# EAGLE board CT_schematic (EAGLE 7.6.0)

Size 100 x 80 mm. Coordinates in mm from the lower left corner, seen from the top.
Outline: 0,0 100,0 100,80 0,80 0,0
Copper layers (1*16): Top 0.035mm / dielectric 1.5mm / Bottom 0.035mm
Design rules "default": minimum track width 10mil, minimum drill 24mil, track to track 8mil, track to pad 8mil, pad to pad 8mil, via to via 8mil, smd to smd 8mil, copper to edge 40mil, drill to drill 8mil, minimum pad ring 10mil, minimum via ring 8mil, stop-mask expansion 4mil, vias tented up to drill 0mil, thermal gap 10mil

## Footprints (pad centres in the part's own frame; a part is rotated, then mirrored left to right if it is on the bottom)
C0603 = smd 0.8 x 0.8: 1 -0.762,0; 2 0.762,0
C0402 = smd 0.5 x 0.5: 1 -0.508,0; 2 0.508,0
R0603 = smd 0.8 x 0.8: 1 -0.762,0; 2 0.762,0
C0805 = smd 1.2 x 1.3: 1 -1.016,0; 2 1.016,0
C1210 = smd 1.2 x 2.5: 1 -1.524,0; 2 1.524,0
EXV-9H = smd 3.505 x 1.676: 1 -2.857,0; 2 2.857,0
L0603 = smd 0.8 x 0.8: 1 -0.762,0; 2 0.762,0
PJ-037B_PACKAGE = drill 3.7 square: 1 12,0 | drill 3.2 square: 2 6,0
WLCSP180 = smd 0.225 x 0.225: A1 -2.4,2.6; A2 -2,2.6; A3 -1.6,2.6; A4 -1.2,2.6; A5 -0.8,2.6; A6 -0.4,2.6; A7 0,2.6; A8 0.4,2.6; A9 0.8,2.6; A10 1.2,2.6; A11 1.6,2.6; A12 2,2.6; A13 2.4,2.6; B1 -2.4,2.2; B2 -2,2.2; B3 -1.6,2.2; B4 -1.2,2.2; B5 -0.8,2.2; B6 -0.4,2.2; B7 0,2.2; B8 0.4,2.2; B9 0.8,2.2; B10 1.2,2.2; B11 1.6,2.2; B12 2,2.2; B13 2.4,2.2; C1 -2.4,1.8; C2 -2,1.8; C3 -1.6,1.8; C4 -1.2,1.8; C5 -0.8,1.8; C6 -0.4,1.8; C7 0,1.8; C8 0.4,1.8; C9 0.8,1.8; C10 1.2,1.8; C11 1.6,1.8; C12 2,1.8; C13 2.4,1.8; D1 -2.4,1.4; D2 -2,1.4; D3 -1.6,1.4; D4 -1.2,1.4; D5 -0.8,1.4; D6 -0.4,1.4; D7 0,1.4; D8 0.4,1.4; D9 0.8,1.4; D10 1.2,1.4; D11 1.6,1.4; D12 2,1.4; D13 2.4,1.4; E1 -2.4,1; E2 -2,1; E3 -1.6,1; E4 -1.2,1; E5 -0.8,1; E6 -0.4,1; E7 0,1; E8 0.4,1; E9 0.8,1; E10 1.2,1; E11 1.6,1; E12 2,1; E13 2.4,1; F1 -2.4,0.6; F2 -2,0.6; F3 -1.6,0.6; F4 -1.2,0.6; F5 -0.8,0.6; F6 -0.4,0.6; F7 0,0.6; F8 0.4,0.6; F9 0.8,0.6; F10 1.2,0.6; F11 1.6,0.6; F12 2,0.6; F13 2.4,0.6; G1 -2.4,0.2; G2 -2,0.2; G3 -1.6,0.2; G4 -1.2,0.2; G5 -0.8,0.2; G6 -0.4,0.2; G8 0.4,0.2; G9 0.8,0.2; G10 1.2,0.2; G11 1.6,0.2; G12 2,0.2; G13 2.4,0.2; H1 -2.4,-0.2; H2 -2,-0.2; H3 -1.6,-0.2; H4 -1.2,-0.2; H5 -0.8,-0.2; H6 -0.4,-0.2; H8 0.4,-0.2; H9 0.8,-0.2; H10 1.2,-0.2; H11 1.6,-0.2; H12 2,-0.2; H13 2.4,-0.2; J1 -2.4,-0.6; J2 -2,-0.6; J3 -1.6,-0.6; J4 -1.2,-0.6; J5 -0.8,-0.6; J6 -0.4,-0.6; J7 0,-0.6; J8 0.4,-0.6; J9 0.8,-0.6; J10 1.2,-0.6; J11 1.6,-0.6; J12 2,-0.6; J13 2.4,-0.6; K1 -2.4,-1; K2 -2,-1; K3 -1.6,-1; K4 -1.2,-1; K5 -0.8,-1; K6 -0.4,-1; K7 0,-1; K8 0.4,-1; K9 0.8,-1; K10 1.2,-1; K11 1.6,-1; K12 2,-1; K13 2.4,-1; L1 -2.4,-1.4; L2 -2,-1.4; L3 -1.6,-1.4; L4 -1.2,-1.4; L5 -0.8,-1.4; L6 -0.4,-1.4; L7 0,-1.4; L8 0.4,-1.4; L9 0.8,-1.4; L10 1.2,-1.4; L11 1.6,-1.4; L12 2,-1.4; L13 2.4,-1.4; M1 -2.4,-1.8; M2 -2,-1.8; M3 -1.6,-1.8; M4 -1.2,-1.8; M5 -0.8,-1.8; M6 -0.4,-1.8; M7 0,-1.8; M8 0.4,-1.8; M9 0.8,-1.8; M10 1.2,-1.8; M11 1.6,-1.8; M12 2,-1.8; M13 2.4,-1.8; N1 -2.4,-2.2; N2 -2,-2.2; N3 -1.6,-2.2; N4 -1.2,-2.2; N5 -0.8,-2.2; N6 -0.4,-2.2; N7 0,-2.2; N8 0.4,-2.2; N9 0.8,-2.2; N10 1.2,-2.2; N11 1.6,-2.2; N12 2,-2.2; N13 2.4,-2.2; P1 -2.4,-2.6; P2 -2,-2.6; P3 -1.6,-2.6; P4 -1.2,-2.6; P5 -0.8,-2.6; P6 -0.4,-2.6; P7 0,-2.6; P8 0.4,-2.6; P9 0.8,-2.6; P10 1.2,-2.6; P11 1.6,-2.6; P12 2,-2.6; P13 2.4,-2.6
SOIC-8 = smd 1.6 x 0.6: 1 -2.7,1.905 | smd 1.55 x 0.6: 2 -2.7,0.635; 3 -2.7,-0.635; 4 -2.7,-1.905; 5 2.7,-1.905; 6 2.7,-0.635; 7 2.7,0.635; 8 2.7,1.905
182-009-MALE = drill 1.194 pad 1.524 octagon: 1 -5.537,10.923; 2 -2.769,10.923; 3 0,10.923; 4 2.769,10.923; 5 5.537,10.923; 6 -4.153,8.08; 7 -1.384,8.08; 8 1.384,8.08; 9 4.153,8.08 | hole 3.048: -12.446,9.501; 12.446,9.501
S25FL128SDSMFI000 = smd 0.5 x 1.6: 1 0,0; 2 1.27,0; 3 2.54,0; 4 3.81,0; 5 5.08,0; 6 6.35,0; 7 7.62,0; 8 8.89,0; 9 8.89,8.9; 10 7.62,8.9; 11 6.35,8.9; 12 5.08,8.9; 13 3.81,8.9; 14 2.54,8.9; 15 1.27,8.9; 16 0,8.9
DFN-6 = smd 0.805 x 0.3: 1 -0.952,0.5; 2 -0.952,0; 3 -0.952,-0.5; 4 0.952,-0.5; 5 0.952,0; 6 0.952,0.5 | smd 0.61 x 1.42: 7 0,0
QFN-24 = smd 0.7 x 0.305: 1 -1.815,1.25; 2 -1.815,0.75; 3 -1.815,0.25; 4 -1.815,-0.25; 5 -1.815,-0.73; 6 -1.815,-1.25; 13 1.815,-1.25; 14 1.815,-0.75; 15 1.815,-0.25; 16 1.815,0.25; 17 1.815,0.75; 18 1.815,1.25 | smd 0.305 x 0.7: 7 -1.25,-1.815; 8 -0.75,-1.815; 9 -0.25,-1.815; 10 0.25,-1.815; 11 0.75,-1.815; 12 1.25,-1.815; 19 1.25,1.815; 20 0.75,1.815; 21 0.25,1.815; 22 -0.25,1.815; 23 -0.75,1.815; 24 -1.25,1.815 | smd 2.591 x 2.591: 25 0,0
MICRO_USB_AB = smd 0.4 x 1.35: 1 1.3,0.26; 2 0.65,0.26; 3 0,0.26; 4 -0.65,0.26; 5 -1.3,0.26 | drill 0.6 pad 0.95 long: 6 4.175,-2.54; 7 -4.175,-2.54 | drill 0.7 pad 1.1 long: 8 -2.225,0.46; 9 2.225,0.46
SOT143B = smd 1 x 0.7: 1 -0.75,-1 | smd 0.6 x 0.7: 2 0.95,-1; 3 0.95,1; 4 -0.95,1
SOT-23-6 = smd 1.1 x 0.6: 1 -1.4,0.95; 2 -1.4,0; 3 -1.4,-0.95; 4 1.4,-0.95; 5 1.4,0; 6 1.4,0.95
ABS07-32.768KHZ-7-T = smd 1.1 x 2.4: 1 -2.5,0; 2 0,0
ABLS-25.000MHZ-B2F-T = smd 5.6 x 2.8: 1 -3.81,0; 2 5.69,0
ASFL1 = smd 1.7 x 1.5: 1 -1.27,-1.1; 2 1.27,-1.1; 3 1.27,1.1; 4 -1.27,1.1
WSON-8 = smd 0.3 x 0.6: 1 -0.75,0; 2 0.05,0; 3 0.85,0; 4 1.65,0; 5 1.65,3.8; 6 0.85,3.8; 7 0.05,3.8; 8 -0.75,3.8 | smd 3 x 2.6: PAD 0.45,1.9
SON-6 = smd 0.55 x 0.3: 1 -0.355,0.5 | smd 0.52 x 0.3: 2 -0.37,0; 3 -0.37,-0.5; 4 0.37,-0.5; 5 0.37,0; 6 0.37,0.5
SW_4-1437565-2 = smd 1.4 x 2.1: 1 -2.23,4.55; 2 -2.23,-4.55; 3 2.23,4.55; 4 2.23,-4.55
LGM67K-G1J2-24-Z = smd 0.8 x 1.4: A -2,0; C 0,0
NC7SZ125M5X = smd 1.3 x 0.7: 1 -1.3,0.95; 2 -1.3,0; 3 -1.3,-0.95; 4 1.3,-0.95; 5 1.3,0.95

## Placement (x,y rotation side)
C1  1e-06  [C0603]  -30.48,77.47 0 top  (outside the outline)
C2  1e-07  [C0603]  -34.29,77.47 0 top  (outside the outline)
C3  1e-07  [C0603]  -38.1,77.47 0 top  (outside the outline)
C4  1e-07  [C0603]  -41.91,77.47 0 top  (outside the outline)
C5  1e-07  [C0603]  -45.72,77.47 0 top  (outside the outline)
C6  1e-07  [C0603]  -49.53,77.47 0 top  (outside the outline)
C7  1e-07  [C0603]  -53.34,77.47 0 top  (outside the outline)
C8  1e-07  [C0603]  -57.15,77.47 0 top  (outside the outline)
C9  1e-07  [C0603]  -60.96,77.47 0 top  (outside the outline)
C10  4.7e-06  [C0603]  -15.24,77.47 0 top  (outside the outline)
C11  1e-07  [C0603]  -64.77,77.47 0 top  (outside the outline)
C12  2.2e-06  [C0603]  -19.05,77.47 0 top  (outside the outline)
C13  2.2e-06  [C0603]  -22.86,77.47 0 top  (outside the outline)
C14  1e-08  [C0603]  -68.58,77.47 0 top  (outside the outline)
C15  1e-06  [C0603]  -72.39,77.47 0 top  (outside the outline)
C16  1e-07  [C0603]  -76.2,77.47 0 top  (outside the outline)
C17  1e-11  [C0402]  -19.05,87.63 0 top  (outside the outline)
C18  1e-11  [C0402]  -22.86,87.63 0 top  (outside the outline)
C19  1e-11  [C0402]  -26.67,87.63 0 top  (outside the outline)
C20  1e-11  [C0402]  -30.48,87.63 0 top  (outside the outline)
C21  1e-08  [C0402]  -34.29,87.63 0 top  (outside the outline)
C22  1e-06  [C0603]  -80.01,77.47 0 top  (outside the outline)
C23  1e-06  [C0603]  -15.24,82.55 0 top  (outside the outline)
C24  1e-06  [C0603]  -19.05,82.55 0 top  (outside the outline)
C25  1e-06  [C0603]  -22.86,82.55 0 top  (outside the outline)
C26  1e-07  [C0402]  -38.1,87.63 0 top  (outside the outline)
C27  1e-08  [C0402]  -41.91,87.63 0 top  (outside the outline)
C28  2.2e-06  [C0603]  -26.67,77.47 0 top  (outside the outline)
C29  1e-08  [C0402]  -45.72,87.63 0 top  (outside the outline)
C30  1e-08  [C0402]  -49.53,87.63 0 top  (outside the outline)
C31  1e-06  [C0603]  -26.67,82.55 0 top  (outside the outline)
C32  1e-08  [C0402]  -53.34,87.63 0 top  (outside the outline)
C33  8e-07  [R0603]  -30.48,82.55 0 top  (outside the outline)
C34  1e-05  [C0805]  -59.69,66.04 0 top  (outside the outline)
C35  1e-08  [C0402]  -57.15,87.63 0 top  (outside the outline)
C36  1e-05  [C1210]  -77.47,58.42 0 top  (outside the outline)
C37  1e-05  [C1210]  -16.51,66.04 0 top  (outside the outline)
C38  1e-08  [C0402]  -60.96,87.63 0 top  (outside the outline)
C39  1e-05  [C1210]  -22.86,66.04 0 top  (outside the outline)
C40  1e-05  [C1210]  -29.21,66.04 0 top  (outside the outline)
C41  1e-07  [C0402]  -64.77,87.63 0 top  (outside the outline)
C42  0.0001  [EXV-9H]  -54.61,49.53 0 top  (outside the outline)
C43  0.0001  [EXV-9H]  -66.04,49.53 0 top  (outside the outline)
C44  1e-08  [C0402]  -68.58,87.63 0 top  (outside the outline)
C45  1e-08  [C0402]  -72.39,87.63 0 top  (outside the outline)
C46  1e-08  [C0402]  -76.2,87.63 0 top  (outside the outline)
F1  240.0  [L0603]  -34.29,82.55 0 top  (outside the outline)
J1  PJ-037B  [PJ-037B_PACKAGE]  -27.94,29.21 0 top  (outside the outline)
R2  1000.0  [R0603]  -38.1,82.55 0 top  (outside the outline)
R4  4700.0  [R0603]  -41.91,82.55 0 top  (outside the outline)
R5  4700.0  [R0603]  -45.72,82.55 0 top  (outside the outline)
R6  4700.0  [R0603]  -49.53,82.55 0 top  (outside the outline)
R7  2200.0  [R0603]  -53.34,82.55 0 top  (outside the outline)
R8  2200.0  [R0603]  -57.15,82.55 0 top  (outside the outline)
R9  10000.0  [R0603]  -25.4,72.39 0 top  (outside the outline)
R10  10000.0  [R0603]  -30.48,72.39 0 top  (outside the outline)
R11  10000.0  [R0603]  -35.56,72.39 0 top  (outside the outline)
R12  10000.0  [R0603]  -40.64,72.39 0 top  (outside the outline)
R13  10000.0  [R0603]  -45.72,72.39 0 top  (outside the outline)
R14  120.0  [R0603]  -60.96,82.55 0 top  (outside the outline)
R15  10000.0  [R0603]  -50.8,72.39 0 top  (outside the outline)
R16  10000.0  [R0603]  -55.88,72.39 0 top  (outside the outline)
R17  10000.0  [R0603]  -60.96,72.39 0 top  (outside the outline)
R18  47000.0  [R0603]  -66.04,72.39 0 top  (outside the outline)
R19  8060.0  [R0603]  -64.77,82.55 0 top  (outside the outline)
R20  100000.0  [R0603]  -64.77,66.04 0 top  (outside the outline)
R21  36000.0  [R0603]  -71.12,72.39 0 top  (outside the outline)
R22  100000.0  [R0603]  -69.85,66.04 0 top  (outside the outline)
R23  100000.0  [R0603]  -74.93,66.04 0 top  (outside the outline)
R24  2231.0  [R0603]  -68.58,82.55 0 top  (outside the outline)
R25  1000.0  [R0603]  -72.39,82.55 0 top  (outside the outline)
R26  100000.0  [R0603]  -80.01,66.04 0 top  (outside the outline)
R27  3900.0  [R0603]  -76.2,82.55 0 top  (outside the outline)
R28  1000.0  [R0603]  -80.01,82.55 0 top  (outside the outline)
R29  10000.0  [R0603]  -76.2,72.39 0 top  (outside the outline)
R30  10000.0  [R0603]  -81.28,72.39 0 top  (outside the outline)
R31  9100.0  [R0603]  -15.24,87.63 0 top  (outside the outline)
R32  680000.0  [R0603]  -15.24,72.39 0 top  (outside the outline)
R33  120000.0  [R0603]  -20.32,72.39 0 top  (outside the outline)
U1  STM32F769AIY6TR  [WLCSP180]  -66.04,26.67 0 top  (outside the outline)
U2  AT25040B-SSHL-T  [SOIC-8]  -24.13,40.64 0 top  (outside the outline)
U3  MCP2562-E/SN  [SOIC-8]  -38.1,40.64 0 top  (outside the outline)
U4  182-009-113R531  [182-009-MALE]  -36.83,6.35 0 top  (outside the outline)
U5  S25FL128SDSMFI000  [S25FL128SDSMFI000]  -71.12,3.81 0 top  (outside the outline)
U6  SI7006-A20-IM  [DFN-6]  -27.94,91.44 0 top  (outside the outline)
U7  USB3317C-CP-TR  [QFN-24]  -69.85,58.42 0 top  (outside the outline)
U8  47590-0001  [MICRO_USB_AB]  -36.83,30.48 0 top  (outside the outline)
U9  prtr5v0u2ax  [SOT143B]  -24.13,92.71 0 top  (outside the outline)
U10  MAX4995AAUT+T  [SOT-23-6]  -35.56,64.77 0 top  (outside the outline)
U11  ABS07-32.768KHZ-7-T  [ABS07-32.768KHZ-7-T]  -49.53,59.69 0 top  (outside the outline)
U12  ABLS-25.000MHZ-B2F-T  [ABLS-25.000MHZ-B2F-T]  -26.67,59.69 0 top  (outside the outline)
U13  ASFL1-26MHZ-NCS  [ASFL1]  -45.72,50.8 0 top  (outside the outline)
U14  LP2951ACSDX/NOPB  [WSON-8]  -29.21,48.26 0 top  (outside the outline)
U15  LP3878SDX-ADJ/NOPB  [WSON-8]  -59.69,39.37 0 top  (outside the outline)
U16  LP3878SDX-ADJ/NOPB  [WSON-8]  -80.01,39.37 0 top  (outside the outline)
U17  TPS3895ADRYR  [SON-6]  -30.48,91.44 0 top  (outside the outline)
U18  4-1437565-2  [SW_4-1437565-2]  -57.15,27.94 0 top  (outside the outline)
U19  Q65110A2395  [LGM67K-G1J2-24-Z]  -58.42,58.42 0 top  (outside the outline)
U20  nc7sz125m5x  [NC7SZ125M5X]  -40.64,66.04 0 top  (outside the outline)
U21  nc7sz125m5x  [NC7SZ125M5X]  -46.99,66.04 0 top  (outside the outline)
U22  nc7sz125m5x  [NC7SZ125M5X]  -53.34,66.04 0 top  (outside the outline)

## Library data of the parts
C1-C46 F1 J1 R2 R4-R33 U1-U22 = circuit_tree

## Nets
CLK_CRYSTAL_U1_E12: C17.1 U1.E12 U11.1
CLK_CRYSTAL_U1_E13: C18.1 U1.E13 U11.2
CLK_CRYSTAL_U1_K12: C19.1 U1.K12 U12.1
CLK_CRYSTAL_U1_K13: C20.1 U1.K13 U12.2
CLK_U7_23: U7.23 U13.3
GND: C1.2 C2.2 C3.2 C4.2 C5.2 C6.2 C7.2 C8.2 C9.2 C10.2 C11.2 C12.2 C13.2 C14.2 C15.2 C16.2 C17.2 C18.2 C19.2 C20.2 C21.2 C22.2 C23.2 C24.2 C25.2 C26.2 C27.2 C28.2 C29.2 C30.2 C31.2 C32.2 C33.2 C34.2 C35.2 C36.2 C37.2 C38.2 C39.2 C40.2 C41.2 C42.2 C43.2 C44.2 C45.2 C46.2 J1.2 R2.2 R9.2 R18.2 R19.2 R22.2 R25.2 R28.2 R31.2 R33.2 U1.A8 U1.A11 U1.B6 U1.C2 U1.F1 U1.F13 U1.H5 U1.J9 U1.J13 U1.M1 U1.M11 U1.N4 U1.N5 U1.P9 U2.4 U3.2 U3.8 U4.5 U5.10 U6.2 U6.7 U7.25 U8.5 U8.6 U8.7 U8.8 U8.9 U9.1 U10.2 U13.2 U14.3 U14.4 U14.PAD U15.3 U15.PAD U16.3 U16.PAD U17.2 U19.C U20.1 U20.3 U21.1 U21.3 U22.1 U22.3
NET_U1_A10: R9.1 U1.A10
NET_U1_C1: C13.1 U1.C1
NET_U1_C8: R8.1 U1.C8 U6.1
NET_U1_C10: R10.1 U1.C10
NET_U1_E9: R7.1 U1.E9 U6.6
NET_U1_H6: U1.H6
NET_U1_J3: U1.J3
NET_U1_L11: R5.1 U1.L11 U21.4
NET_U1_M12: C14.1 C15.1 F1.1 U1.M12
NET_U1_P5: C12.1 U1.P5
NET_U1_P7: U19.A
NET_U1_P8: U18.3 U18.4
NET_U2_3: R11.1 U2.3
NET_U2_7: R13.1 U2.7
NET_U3_6: R14.2 U3.6
NET_U4_2: R14.2 U3.6 U4.2
NET_U4_3: R14.1 U3.7 U4.3
NET_U5_3: R4.1 U5.3 U20.4
NET_U7_4: C28.1 U7.4
NET_U7_22: R6.1 U7.22 U22.4
NET_U7_24: R19.1 U7.24
NET_U8_1: C31.1 U7.2 U8.1 U9.4 U10.1
NET_U8_2: U7.5 U8.2 U9.3
NET_U8_3: U7.6 U8.3 U9.2
NET_U8_4: U7.1 U8.4
NET_U10_1: U10.1
NET_U10_3: R18.1 U10.3
NET_U10_4: U7.7 U10.4
NET_U14_5: R20.1 U14.5
NET_U14_7: R21.2 R22.1 U14.7
NET_U15_1: C35.1 U15.1
NET_U15_6: R24.2 R25.1 U15.6
NET_U15_8: R23.1 U15.8
NET_U16_1: C38.1 U16.1
NET_U16_6: R27.2 R28.1 U16.6
NET_U16_8: R26.1 U16.8
NET_U17_1: R30.1 R31.1 U17.1
NET_U17_3: R32.2 R33.1 U17.3
NET_U17_4: R29.1 U17.4 U20.2 U21.2 U22.2
NET_U18_1: R2.1 U18.1 U18.2
PROC_CAN1_RX: U1.A4 U3.4
PROC_CAN1_TX: U1.D1 U3.1
PROC_QUADSPI_BK1_IO0: U1.E1 U5.15
PROC_QUADSPI_BK1_IO1: U1.B4 U5.8
PROC_QUADSPI_BK1_IO2: R16.1 U1.E10 U5.9
PROC_QUADSPI_BK1_IO3: R17.1 U1.J11 U5.1
PROC_QUADSPI_BK1_NCS: R15.1 U1.B9 U5.7
PROC_QUADSPI_CLK: U1.J7 U5.16
PROC_SPI1_MISO: U1.C6 U2.2
PROC_SPI1_MOSI: U1.E7 U2.5
PROC_SPI1_NSS: R12.1 U1.A7 U2.1
PROC_SPI1_SCK: U1.B7 U2.6
PROC_USB_OTG_HS_ULPI_CK: U1.P11 U7.12
PROC_USB_OTG_HS_ULPI_D0: U1.M10 U7.16
PROC_USB_OTG_HS_ULPI_D1: U1.P10 U7.15
PROC_USB_OTG_HS_ULPI_D2: U1.J8 U7.14
PROC_USB_OTG_HS_ULPI_D3: U1.K5 U7.13
PROC_USB_OTG_HS_ULPI_D4: U1.L5 U7.11
PROC_USB_OTG_HS_ULPI_D5: U1.H8 U7.10
PROC_USB_OTG_HS_ULPI_D6: U1.J5 U7.9
PROC_USB_OTG_HS_ULPI_D7: U1.A9 U7.8
PROC_USB_OTG_HS_ULPI_DIR: U1.F11 U7.19
PROC_USB_OTG_HS_ULPI_NXT: U1.N12 U7.18
PROC_USB_OTG_HS_ULPI_STP: U1.L12 U7.20
VCC_S1_12V4: C33.1 C36.1 C39.1 C42.1 C43.1 J1.1 R23.2 R26.2 U14.8 U15.4 U16.4
VCC_TIER1_1V8: C21.1 C30.1 C34.1 C44.1 C45.1 C46.1 R11.2 R12.2 R13.2 R20.2 R21.1 U2.8 U7.21 U14.1 U20.5 U21.5 U22.5
VCC_TIER1_3V3: C1.1 C2.1 C3.1 C4.1 C5.1 C6.1 C7.1 C8.1 C9.1 C10.1 C11.1 C16.1 C23.1 C24.1 C25.1 C26.1 C27.1 C29.1 C32.1 C37.1 C41.1 F1.2 R4.2 R5.2 R6.2 R7.2 R8.2 R10.2 R15.2 R16.2 R17.2 R24.1 R29.2 R30.2 R32.1 U1.A6 U1.B2 U1.B8 U1.B11 U1.C13 U1.F2 U1.F12 U1.J12 U1.K1 U1.K9 U1.M8 U1.P4 U3.5 U5.2 U5.14 U6.5 U7.3 U7.17 U13.4 U15.5 U17.6
VCC_TIER1_5V0: C22.1 C40.1 R27.1 U3.3 U10.5 U16.5

## Tracks (layer width: path | path; a pad name or v marks a point on that pad's centre or on a via)
CLK_CRYSTAL_U1_E12  (2 unrouted)
CLK_CRYSTAL_U1_E13  (2 unrouted)
CLK_CRYSTAL_U1_K12  (2 unrouted)
CLK_CRYSTAL_U1_K13  (2 unrouted)
CLK_U7_23  (1 unrouted)
GND  (100 unrouted)
NET_U1_A10  (1 unrouted)
NET_U1_C1  (1 unrouted)
NET_U1_C8  (2 unrouted)
NET_U1_C10  (1 unrouted)
NET_U1_E9  (2 unrouted)
NET_U1_L11  (2 unrouted)
NET_U1_M12  (3 unrouted)
NET_U1_P5  (1 unrouted)
NET_U1_P8  (1 unrouted)
NET_U2_3  (1 unrouted)
NET_U2_7  (1 unrouted)
NET_U3_6  (1 unrouted)
NET_U4_2  (2 unrouted)
NET_U4_3  (2 unrouted)
NET_U5_3  (2 unrouted)
NET_U7_4  (1 unrouted)
NET_U7_22  (2 unrouted)
NET_U7_24  (1 unrouted)
NET_U8_1  (4 unrouted)
NET_U8_2  (2 unrouted)
NET_U8_3  (2 unrouted)
NET_U8_4  (1 unrouted)
NET_U10_3  (1 unrouted)
NET_U10_4  (1 unrouted)
NET_U14_5  (1 unrouted)
NET_U14_7  (2 unrouted)
NET_U15_1  (1 unrouted)
NET_U15_6  (2 unrouted)
NET_U15_8  (1 unrouted)
NET_U16_1  (1 unrouted)
NET_U16_6  (2 unrouted)
NET_U16_8  (1 unrouted)
NET_U17_1  (2 unrouted)
NET_U17_3  (2 unrouted)
NET_U17_4  (4 unrouted)
NET_U18_1  (2 unrouted)
PROC_CAN1_RX  (1 unrouted)
PROC_CAN1_TX  (1 unrouted)
PROC_QUADSPI_BK1_IO0  (1 unrouted)
PROC_QUADSPI_BK1_IO1  (1 unrouted)
PROC_QUADSPI_BK1_IO2  (2 unrouted)
PROC_QUADSPI_BK1_IO3  (2 unrouted)
PROC_QUADSPI_BK1_NCS  (2 unrouted)
PROC_QUADSPI_CLK  (1 unrouted)
PROC_SPI1_MISO  (1 unrouted)
PROC_SPI1_MOSI  (1 unrouted)
PROC_SPI1_NSS  (2 unrouted)
PROC_SPI1_SCK  (1 unrouted)
PROC_USB_OTG_HS_ULPI_CK  (1 unrouted)
PROC_USB_OTG_HS_ULPI_D0  (1 unrouted)
PROC_USB_OTG_HS_ULPI_D1  (1 unrouted)
PROC_USB_OTG_HS_ULPI_D2  (1 unrouted)
PROC_USB_OTG_HS_ULPI_D3  (1 unrouted)
PROC_USB_OTG_HS_ULPI_D4  (1 unrouted)
PROC_USB_OTG_HS_ULPI_D5  (1 unrouted)
PROC_USB_OTG_HS_ULPI_D6  (1 unrouted)
PROC_USB_OTG_HS_ULPI_D7  (1 unrouted)
PROC_USB_OTG_HS_ULPI_DIR  (1 unrouted)
PROC_USB_OTG_HS_ULPI_NXT  (1 unrouted)
PROC_USB_OTG_HS_ULPI_STP  (1 unrouted)
VCC_S1_12V4  (10 unrouted)
VCC_TIER1_1V8  (16 unrouted)
VCC_TIER1_3V3  (55 unrouted)
VCC_TIER1_5V0  (5 unrouted)